# EAGLE board eagle-breadboard-export (EAGLE 7.6.0)

Size 73.58 x 76.09 mm. Coordinates in mm from the lower left corner, seen from the top.
Outline: 0,0 56.82,0 56.82,53.33 0,53.33 0,0
Copper layers (1*16): Top 0.035mm / dielectric 1.5mm / Bottom 0.035mm
Design rules "default": minimum track width 10mil, minimum drill 24mil, track to track 8mil, track to pad 8mil, pad to pad 8mil, via to via 8mil, smd to smd 8mil, copper to edge 40mil, drill to drill 8mil, minimum pad ring 10mil, minimum via ring 8mil, stop-mask expansion 4mil, vias tented up to drill 0mil, thermal gap 10mil

## Footprints (pad centres in the part's own frame; a part is rotated, then mirrored left to right if it is on the bottom)
LED5MM = drill 0.813 octagon: A -1.27,0; K 1.27,0
PIEZO-12MM = drill 1 pad 2.54: P$1 -3.25,0; P$2 3.25,0
0207/10 = drill 0.813 octagon: 1 -5.08,0; 2 5.08,0
ARDUINO_UNO = drill 1.016 pad 1.88: 0 63.5,50.8; 1 60.96,50.8; 2 58.42,50.8; 3 55.88,50.8; 3.3V 35.56,2.54; 4 53.34,50.8; 5 50.8,50.8; 5V 38.1,2.54; 6 48.26,50.8; 7 45.72,50.8; 8 41.656,50.8; 9 39.116,50.8; 10 36.576,50.8; 11 34.036,50.8; 12 31.496,50.8; 13 28.956,50.8; A0 50.8,2.54; A1 53.34,2.54; A2 55.88,2.54; A3 58.42,2.54; A4 60.96,2.54; A5 63.5,2.54; AREF 23.876,50.8; GND 26.416,50.8; GND. 43.18,2.54; GND.. 40.64,2.54; I/OREF 30.48,2.54; N/C 27.94,2.54; RESET 33.02,2.54; SCL 18.796,50.8; SDA 21.336,50.8; VIN 45.72,2.54 | hole 3.2: 66.04,7.62; 66.04,35.56; 15.24,50.8; 13.97,2.54

## Placement (x,y rotation side)
DBD(2,1)-pin2  [LED5MM]  5,137.08 0 top  (outside the outline)
DBE(2,0)-pin3  [LED5MM]  5,124.38 0 top  (outside the outline)
DCD(0,1)-pin6  [LED5MM]  5,48.18 0 top
DCE(0,0)-pin7  [LED5MM]  5,86.28 0 top  (outside the outline)
DMD(1,1)-pin4  [LED5MM]  5,98.98 0 top  (outside the outline)
DME(1,0)-pin5  [LED5MM]  5,73.58 0 top
PIEZObuzzer13-dó  [PIEZO-12MM]  5,10.08 0 top
RregistorBaixo  1k‎Ω  [0207/10]  5,60.88 0 top
RregistorCima  1k‎Ω  [0207/10]  5,35.48 0 top
RregistorMeio  1k‎Ω  [0207/10]  5,111.68 0 top  (outside the outline)
Uplaca principal  [ARDUINO_UNO]  5,22.78 0 top

## Library data of the parts
DBD(2,1)-pin2 DBE(2,0)-pin3 DCD(0,1)-pin6 DCE(0,0)-pin7 DMD(1,1)-pin4 DME(1,0)-pin5 PIEZObuzzer13-dó RregistorBaixo RregistorCima RregistorMeio Uplaca principal = AUTODESK_CIRCUITS_BREADBOARD

## Nets
N$1: DCD(0,1)-pin6.A Uplaca principal.6
N$2: DME(1,0)-pin5.A Uplaca principal.5
N$3: DMD(1,1)-pin4.K DME(1,0)-pin5.K RregistorMeio.2
N$4: DCE(0,0)-pin7.A Uplaca principal.7
N$5: DCD(0,1)-pin6.K DCE(0,0)-pin7.K RregistorCima.2
N$6: DMD(1,1)-pin4.A Uplaca principal.4
N$7: DBE(2,0)-pin3.A Uplaca principal.3
N$8: DBD(2,1)-pin2.K DBE(2,0)-pin3.K RregistorBaixo.2
N$9: DBD(2,1)-pin2.A Uplaca principal.2
N$10: RregistorBaixo.1 RregistorCima.1 RregistorMeio.1 Uplaca principal.GND
N$11: PIEZObuzzer13-dó.P$1 Uplaca principal.GND..
N$12: PIEZObuzzer13-dó.P$2 Uplaca principal.13

## Tracks (layer width: path | path; a pad name or v marks a point on that pad's centre or on a via)
N$1  (1 unrouted)
N$2  (1 unrouted)
N$3  (2 unrouted)
N$4  (1 unrouted)
N$5  (2 unrouted)
N$6  (1 unrouted)
N$7  (1 unrouted)
N$8  (2 unrouted)
N$9  (1 unrouted)
N$10  (3 unrouted)
N$11  (1 unrouted)
N$12  (1 unrouted)